# EAGLE board motor (EAGLE 4.16)
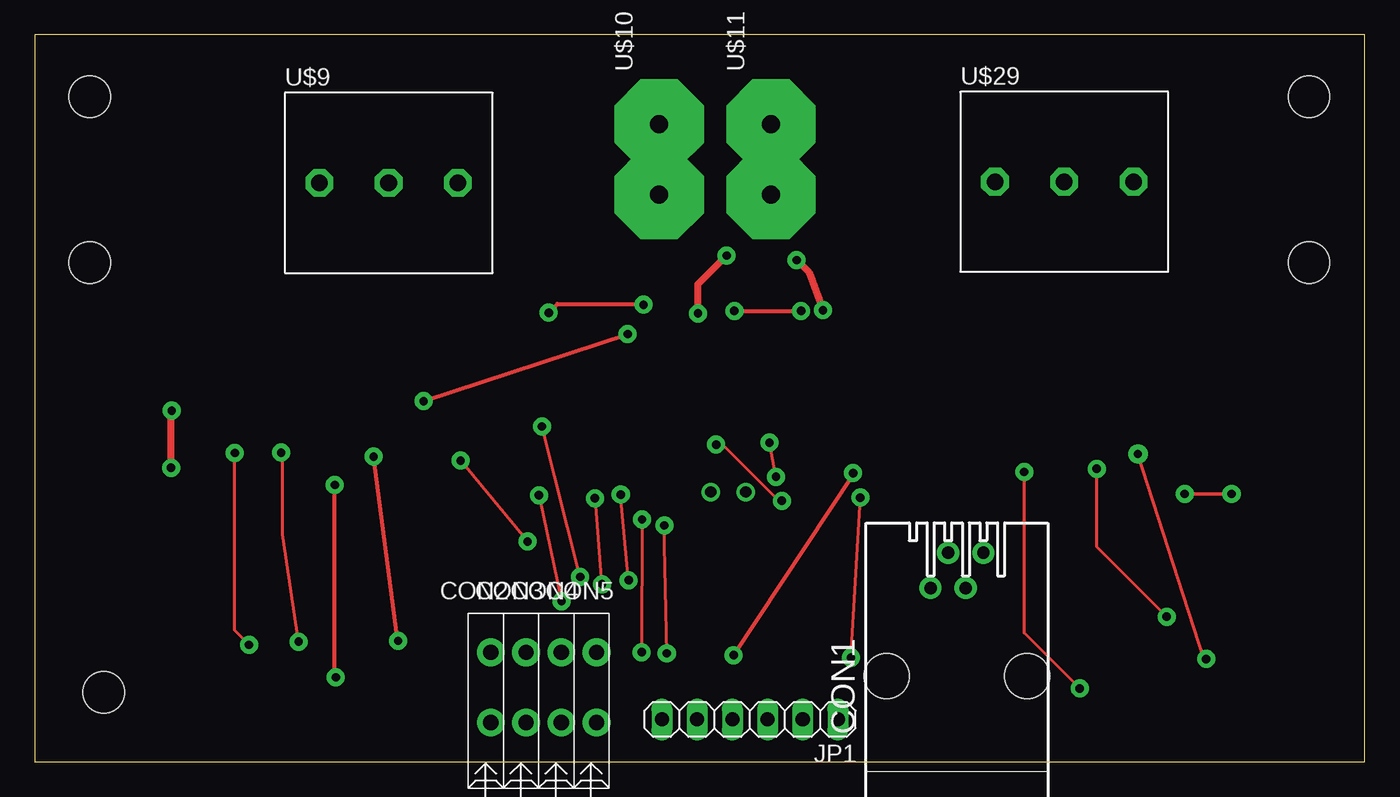
[diagram p0: board, top side]
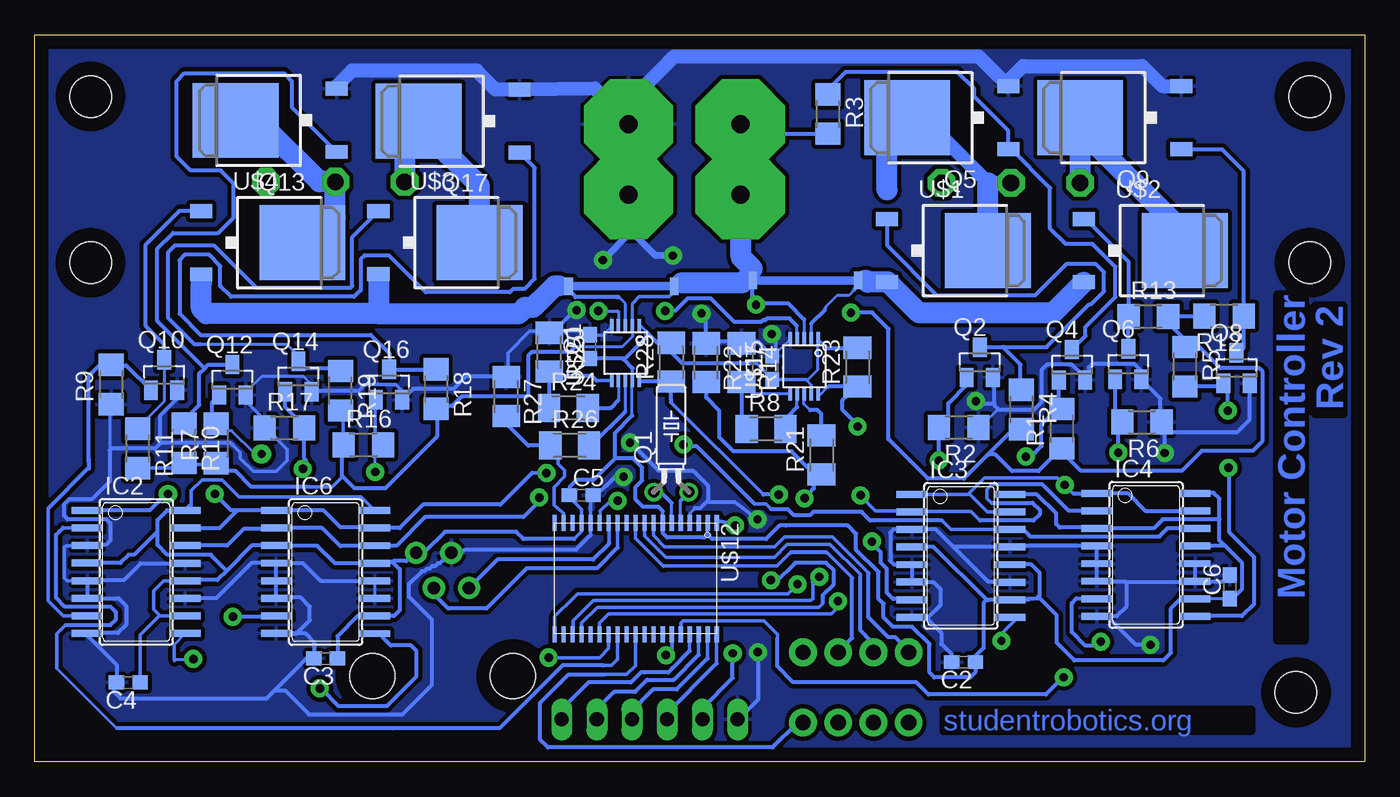
[diagram p1: board, bottom side, seen from below]

Size 96 x 52.5 mm. Coordinates in mm from the lower left corner, seen from the top.
Outline: 0,0 96,0 96,52.5 0,52.5 0,0
Copper layers (1*16): Top 0.035mm / dielectric 1.5mm / Bottom 0.035mm
Design rules "default": minimum track width 10mil, minimum drill 24mil, track to track 8mil, track to pad 8mil, pad to pad 8mil, via to via 8mil, smd to smd 8mil, copper to edge 40mil, drill to drill 8mil, minimum pad ring 10mil, minimum via ring 8mil, stop-mask expansion 4mil, vias tented up to drill 0mil, thermal gap 10mil
Holes 3 mm at 3.97,48.03 4.97,5.03 91.97,48.03 91.97,36.03 3.97,36.03

## Footprints (pad centres in the part's own frame; a part is rotated, then mirrored left to right if it is on the bottom)
C0603 = smd 1.1 x 1: 1 -0.85,0; 2 0.85,0
RJ11 = drill 0.889 pad 1.6 round: 1 1.905,7.62; 2 0.635,5.08; 3 -0.635,7.62; 4 -1.905,5.08 | hole 3.251: -5.08,-1.27; 5.08,-1.27
CAGECLAMP = drill 1.1 pad 2 round: 1 0,-0.01; 2 0,-5.08
SOP16 = smd 0.5 x 2.2: 1 -4.445,-3.55; 2 -3.185,-3.55; 3 -1.915,-3.55; 4 -0.645,-3.55; 5 0.635,-3.55; 6 1.895,-3.55; 7 3.165,-3.55; 8 4.435,-3.55; 9 4.445,3.55; 10 3.175,3.55; 11 1.905,3.55; 12 0.635,3.55; 13 -0.635,3.55; 14 -1.905,3.55; 15 -3.175,3.55; 16 -4.445,3.55
1X06 = drill 1.016 long: 1 -6.35,0; 2 -3.81,0; 3 -1.27,0; 4 1.27,0; 5 3.81,0; 6 6.35,0
TC26H = drill 0.813 round: 1 -1.27,0; 2 1.27,0
SOT23 = smd 1 x 1.4: 1 -0.95,-1.1; 2 0.95,-1.1; 3 0,1.1
TO252-3 = smd 1 x 1.6: 1 -2.16,-5.72; 3 2.4,-5.72 | smd 5.4 x 6.2: 2 0.12,1.58
R1206 = smd 1.6 x 1.803: 1 -1.422,0; 2 1.422,0
M1206 = smd 1.6 x 2: 1 -1.4,0; 2 1.4,0
HEADER_5MM_3 = drill 1.2 pad 2 octagon: 1 0,0; 2 5,0; 3 10,0
SPADE = drill 1.3 pad 6.452 octagon: P$1 -5.08,-3.175; P$2 0,-3.175
TSSOP38 = smd 1.15 x 0.3: 1 0,0; 2 0,-0.65; 3 0,-1.3; 4 0,-1.95; 5 0,-2.6; 6 0,-3.25; 7 0,-3.9; 8 0,-4.55; 9 0,-5.2; 10 0,-5.85; 11 0,-6.5; 12 0,-7.15; 13 0,-7.8; 14 0,-8.45; 15 0,-9.1; 16 0,-9.75; 17 0,-10.4; 18 0,-11.05; 19 0,-11.7; 20 8.05,-11.7; 21 8.05,-11.05; 22 8.05,-10.4; 23 8.05,-9.75; 24 8.05,-9.1; 25 8.05,-8.45; 26 8.05,-7.8; 27 8.05,-7.15; 28 8.05,-6.5; 29 8.05,-5.85; 30 8.05,-5.2; 31 8.05,-4.55; 32 8.05,-3.9; 33 8.05,-3.25; 34 8.05,-2.6; 35 8.05,-1.95; 36 8.05,-1.3; 37 8.05,-0.65; 38 8.05,0
TRACK-RESISTOR = smd 0.635 x 1.27: P$1 -3.81,0; P$2 3.81,0
UMAX = smd 0.94 x 0.254: 1 -1.358,0.193; 2 -1.358,-0.307; 3 -1.358,-0.808; 4 -1.358,-1.308; 5 -1.358,-1.808; 6 2.616,-1.808; 7 2.616,-1.308; 8 2.616,-0.808; 9 2.616,-0.307; 10 2.616,0.193

## Placement (x,y rotation side)
C1  100nf  [C0603]  55.92,29.98 90 bottom
C2  100nf  [C0603]  28.96,7.21 180 bottom
C3  100nf  [C0603]  75,7.46 180 bottom
C4  100nf  [C0603]  89.24,5.74 180 bottom
C5  100nf  [C0603]  56.56,19.25 0 bottom
C6  100nf  [C0603]  9.74,12.63 90 bottom
C7  100nf  [C0603]  42.77,28.45 90 bottom
CON1  MODULE_CON  [RJ11]  66.56,7.48 0 top
CON2  FB0  [CAGECLAMP]  32.93,2.83 180 top
CON3  FB1  [CAGECLAMP]  35.47,2.83 180 top
CON4  FB3  [CAGECLAMP]  38.01,2.83 180 top
CON5  FB2  [CAGECLAMP]  40.55,2.83 180 top
IC2  74153NS  [SOP16]  88.67,13.71 270 bottom
IC3  74153NS  [SOP16]  29.15,14.88 270 bottom
IC4  74153NS  [SOP16]  15.8,14.94 270 bottom
IC6  74153NS  [SOP16]  75,13.71 270 bottom
JP1  JTAG  [1X06]  51.62,3.06 180 top
Q1  32Khz  [TC26H]  50.05,19.48 0 bottom
Q2  2N7002  [SOT23]  27.79,28.85 0 bottom
Q4  2N7002  [SOT23]  21.13,28.67 0 bottom
Q5  FDD8882  [TO252-3]  31.45,46.38 90 bottom
Q6  2N7002  [SOT23]  17.07,28.71 0 bottom
Q8  2N7002  [SOT23]  9.27,28.43 0 bottom
Q9  FDD8882  [TO252-3]  18.97,46.38 90 bottom
Q10  2N7002  [SOT23]  86.66,27.94 0 bottom
Q12  2N7002  [SOT23]  81.73,27.59 0 bottom
Q13  FDD8882  [TO252-3]  79.92,46.19 90 bottom
Q14  2N7002  [SOT23]  76.97,27.82 0 bottom
Q16  2N7002  [SOT23]  70.42,27.24 0 bottom
Q17  FDD8882  [TO252-3]  66.73,46.13 90 bottom
R1  [R1206]  21.88,24.05 90 bottom
R2  [R1206]  29.31,24.15 180 bottom
R3  [R1206]  38.73,46.77 270 bottom
R4  [R1206]  24.79,25.44 270 bottom
R5  [R1206]  12.99,28.53 270 bottom
R6  [R1206]  16.09,24.54 180 bottom
R7  [R1206]  82.89,22.99 90 bottom
R8  [M1206]  43.21,24.04 0 bottom
R9  [R1206]  90.49,27.24 90 bottom
R10  [R1206]  85.21,23.01 270 bottom
R11  [R1206]  88.56,22.62 270 bottom
R12  [R1206]  10.16,32.2 180 bottom
R13  [R1206]  15.62,32.13 0 bottom
R14  [M1206]  44.99,28.82 270 bottom
R16  [R1206]  72.27,22.87 0 bottom
R17  [R1206]  77.97,24.1 0 bottom
R18  [R1206]  67.02,26.92 270 bottom
R19  [R1206]  73.92,26.8 270 bottom
R21  [M1206]  39.21,22.16 90 bottom
R22  [M1206]  47.54,28.82 270 bottom
R23  [M1206]  36.62,28.49 90 bottom
R24  [M1206]  57.48,25.55 0 bottom
R25  [M1206]  58.85,29.58 270 bottom
R26  [M1206]  57.38,22.84 0 bottom
R27  [M1206]  61.96,26.38 270 bottom
R28  [M1206]  50.06,28.85 90 bottom
U$1  FQD17P06  [TO252-3]  28.78,37.02 270 bottom
U$2  FQD17P06  [TO252-3]  14.56,37.02 270 bottom
U$3  FQD17P06  [TO252-3]  65.48,37.61 270 bottom
U$4  FQD17P06  [TO252-3]  78.25,37.6 270 bottom
U$9  HEADER_3_5MM  [HEADER_5MM_3]  20.55,41.8 0 top
U$10  6.3X0.8-SPADE  [SPADE]  41.9,46.05 90 top
U$11  6.3X0.8-SPADE  [SPADE]  49.96,46.04 90 top
U$12  MSP430F2234  [TSSOP38]  46.77,17.26 270 bottom
U$13  TRACKRESISTOR  [TRACK-RESISTOR]  40.37,34.76 180 bottom
U$15  MAX4069  [UMAX]  39.66,29.19 270 bottom
U$17  TRACKRESISTOR  [TRACK-RESISTOR]  53.65,34.34 0 bottom
U$20  MAX4069  [UMAX]  52.55,30.15 270 bottom
U$29  HEADER_3_5MM  [HEADER_5MM_3]  69.31,41.88 0 top

## Library data of the parts
C1-C7 R1-R7 R9-R13 R16-R19 = quantum-sensor
CON1-CON5 IC2-IC4 IC6 Q2 Q4-Q6 Q8-Q10 Q12-Q14 Q16 Q17 U$1-U$4 U$9 U$12 U$29 = ecssr
JP1 = pinhead
Q1 = crystal
R8 R14 R21-R28 = rcl
U$10 U$11 U$13 U$15 U$17 U$20 = ecssr-Pwr

## Nets
+12V: R1.1 R3.2 R4.2 R5.1 R7.1 R10.2 R11.2 R12.2 R13.2 R16.1 R18.2 R19.2 U$10.P$2 U$13.P$2 U$15.3 U$17.P$2 U$20.2
FEEDBACK_0: CON2.2 U$12.8
FEEDBACK_1: CON3.2 U$12.9
FEEDBACK_2: CON4.2 U$12.10
FEEDBACK_3: CON5.1 U$12.29
GND: C1.2 C2.2 C3.2 C4.2 C5.2 C6.2 C7.2 CON1.3 IC2.3 IC2.5 IC2.6 IC2.8 IC2.11 IC2.13 IC3.3 IC3.5 IC3.6 IC3.8 IC3.11 IC3.13 IC4.4 IC4.5 IC4.6 IC4.8 IC4.11 IC4.12 IC6.4 IC6.5 IC6.6 IC6.8 IC6.11 IC6.12 JP1.6 Q2.2 Q4.2 Q5.3 Q6.2 Q8.2 Q9.3 Q10.2 Q12.2 Q13.3 Q14.2 Q16.2 Q17.3 R2.1 R6.1 R9.1 R14.1 R17.1 R22.1 R25.1 R27.1 U$11.P$2 U$12.4 U$12.15 U$15.5 U$20.5
M0_A: IC3.14 IC4.14 U$12.14
M0_B: IC3.2 IC4.2 U$12.25
M0_COUT: R21.1 R22.2 U$12.20
M0_GSEL: R23.1 U$12.22 U$15.10
M0_PWM: IC3.1 IC3.15 IC4.1 IC4.15 U$12.34
M0_V+: U$1.3 U$2.3 U$13.P$1 U$15.2
M1_A: IC2.14 IC6.2 IC6.14 U$12.26
M1_B: IC2.2 U$12.27
M1_COUT: R26.1 R27.2 U$12.18
M1_GSEL: R28.1 U$12.23 U$20.10
M1_PWM: IC2.1 IC2.15 IC6.1 IC6.15 U$12.33
M1_V+: U$3.3 U$4.3 U$17.P$1 U$20.3
N$1: JP1.1 U$12.35
N$2: JP1.2 U$12.36
N$3: Q5.2 U$1.2 U$9.2
N$4: Q1.1 U$12.6
N$5: Q2.3 R4.1 U$1.1
N$6: Q4.3 Q5.1 R3.1
N$7: JP1.3 U$12.37
N$8: IC3.7 Q2.1 R2.2
N$9: JP1.4 U$12.38
N$10: JP1.5 U$12.1
N$11: Q17.2 U$3.2 U$29.1
N$12: Q13.2 U$4.2 U$29.2
N$13: IC3.9 Q4.1 R1.2
N$14: Q9.2 U$2.2 U$9.1
N$15: Q6.3 R13.1 U$2.1
N$16: Q8.3 Q9.1 R12.1
N$17: IC4.7 Q6.1 R6.2
N$18: IC4.9 Q8.1 R5.2
N$19: Q1.2 U$12.5
N$23: R21.2 U$15.8
N$25: R8.2 U$15.7
N$26: Q10.3 R11.1 U$4.1
N$27: Q12.3 Q13.1 R10.1
N$28: R8.1 R14.2 U$15.6
N$29: IC2.7 Q10.1 R9.2
N$30: IC2.9 Q12.1 R7.2
N$32: R24.2 U$20.7
N$33: R24.1 R25.2 U$20.6
N$34: R26.2 U$20.8
N$37: Q14.3 R19.1 U$3.1
N$38: Q16.3 Q17.1 R18.1
N$39: IC6.7 Q14.1 R17.2
N$40: IC6.9 Q16.1 R16.2
N$46: U$12.30
N.C.: U$15.4 U$20.4
SCL: CON1.4 U$12.13
SDA: CON1.2 U$12.12
VDD: C1.1 C2.1 C3.1 C4.1 C5.1 C6.1 C7.1 CON1.1 IC2.4 IC2.10 IC2.12 IC2.16 IC3.4 IC3.10 IC3.12 IC3.16 IC4.3 IC4.10 IC4.13 IC4.16 IC6.3 IC6.10 IC6.13 IC6.16 R23.2 R28.2 U$12.2 U$12.7 U$12.16 U$15.1 U$15.9 U$20.1 U$20.9

## Tracks (layer width: path | path; a pad name or v marks a point on that pad's centre or on a via)
+12V  (via drill 0.6 pad 1.3)
  Top 0.2: 43.97,33.05 43.97,33.03 v43.95,33.01
  Top 0.3: v37.09,32.43 37.72,33.05 43.97,33.05
  Bottom 0.2: U$17.P$2 49.84,33.91 49.99,33.76 50.02,33.78 | U$13.P$2 44.18,34.56 | 49.34,34.33 49.37,34.36 49.39,34.34 U$17.P$2 | 14.54,32.2 14.47,32.13 R13.2 14.2,31.8 14.25,31.76 | 44.64,46.41 44.95,46.41 45.55,45.8 45.55,45.88 45.2,46.23 45.07,46.11 U$10.P$2 | 12.99,30.5 R5.1 13.65,29.95 | 40.46,31.95 U$15.3 | 73.92,25.53 R19.2 73.75,25.2 | 67.09,25.42 67.09,25.33 | R18.2 67.09,25.42 | 67.09,25.42 67.09,25.71 | 73.75,22.17 R16.1 73.69,22.7 73.55,22.55 | 88.67,21.23 88.59,21.23 R11.2 | R10.2 85.87,21.23 | 24.79,23.8 24.79,23.82 R4.2 | 85.68,21 85.75,20.93 | R10.2 85.68,21 | R7.1 83.61,21.46 83.61,21.21 83.41,21 | 85.68,21 85.5,21.17 | R7.1 83.12,21.23 83.09,21.26 82.75,20.91 | 37.07,32.41 v37.09,32.43 v37.09,32.44 | R18.2 67,25.53 66.97,25.51 | 57.07,29.96 57.02,29.96 53.62,29.96 52.86,30.71 U$20.2 52.87,33.08 52.8,33.16 | 67.37,25.68 67.2,25.68 R18.2 | U$13.P$2 44.2,34.76 44.22,34.73 44.17,34.68 44.17,34.26 | 44.17,34.26 44.17,34.2 | U$13.P$2 44.18,35.59 44.2,35.61 | U$13.P$2 44.72,34.76 44.74,34.78 | 49.3,34.58 49.32,34.55 49.62,34.55 U$17.P$2 | 21.95,22.55 21.94,22.55 R1.1 21.93,22.62 | 44.05,33.11 v43.95,33.01 44.02,33.08 44.02,33.11 44.2,33.28 | 44.2,34.26 44.17,34.26 | 83.09,21.03 | R7.1 83.09,21.03 | 83.09,21.03 82.47,21.03 | R4.2 25.01,24.24 | R10.2 85.33,21.58 85.41,21.5 85.37,21.46 | 27.22,22.26 27.17,22.21 27.15,22.19 | R4.2 24.68,24.12 24.68,24.2 25.19,24.2
  Bottom 0.25: 73.75,22.17 73.75,25.2 | 85.87,21.23 88.59,21.23 | 83.61,21.46 85.37,21.46 | 34.39,23.3 34.37,23.32 | 73.81,22.75 R16.1 | 73.81,20.64 73.78,20.61 74.53,19.86 76.25,19.86 | 50.02,33.78 50.22,33.58 52.37,33.58 52.8,33.16
  Bottom 0.3: 14.54,32.2 R12.2 | R3.2 43.58,45.34 44.64,46.41 | 12.99,30.5 14.25,31.76 | R5.1 11.94,29.95 10.42,28.43 7.62,28.43 7.37,28.18 7.37,23.18 8.09,22.46 11.77,22.46 13.21,21.01 20.48,21.01 22.07,22.6 22.05,22.62 R1.1 | 67.2,25.68 65.87,25.68 65.18,26.37 60.51,26.37 60.38,26.5 60.38,29.32 60.13,29.57 57.37,29.57 57.02,29.92 57.02,29.96 | 40.46,31.95 41.62,33.11 44.02,33.11 | 44.2,33.28 44.2,34.26 | 66.97,25.51 66.97,23.48 70.7,19.76 72.92,19.76 73.78,20.61 | 76.25,19.86 80.36,19.86 81.51,21 83.41,21 | 25.19,24.2 27.17,22.21 28.93,20.46 31.55,20.46 34.39,23.3 | 21.93,22.62 23.56,20.99 25.47,20.99 26.67,22.19 27.15,22.19 | v37.09,32.44 35.56,32.44 34.37,31.25 34.37,23.32 | 73.81,20.64 73.81,22.75
  Bottom 1: 45.14,45.98 U$10.P$2 45.14,46.12 45.14,46.2
  Bottom 1.5: 45.02,46.1 45.02,46.16 | 45.02,46.1 U$10.P$2 | 44.2,35.61 45.02,36.43 45.02,46.1 | 44.74,34.78 44.95,34.58 49.3,34.58
FEEDBACK_0
  Bottom 0.2: 51.34,17.36 51.34,17.28 U$12.8 | 33.08,7.91 33.09,7.93 | 33.08,7.91 CON2.2 32.93,8.04 | 33.08,7.91 32.93,7.77 | 35.8,10.4 35.82,10.4
  Bottom 0.25: 51.34,17.28 51.34,16.34 50.54,15.53 43.05,15.53 | 43.05,15.53 43.01,15.53 | 35.82,13.63 35.82,13.64 38.43,16.25 41.88,16.25 42.6,15.53 43.05,15.53
  Bottom 0.3: 35.82,10.4 35.82,13.63 | 32.93,8.04 33.9,9 34.4,9 35.8,10.4
FEEDBACK_1
  Bottom 0.2: 51.97,17.33 U$12.9 | 51.95,16.41 51.97,16.41 51.97,16.32 | 35.55,7.83 CON3.2
  Bottom 0.25: 51.97,16.46 U$12.9 | 51.97,16.41 51.97,16.46 | 36.42,13.38 36.42,13.53 38.59,15.7 41.7,15.7 42.62,14.78 50.45,14.78 51.99,16.32 51.97,16.32 | 51.97,16.46 51.98,16.46 51.98,16.39
  Bottom 0.3: 36.42,13.38 36.42,9.5 35.59,8.68 35.59,7.88 35.55,7.83
FEEDBACK_2
  Bottom 0.2: 52.64,17.38 52.64,17.28 U$12.10 | 38.07,7.88 38.04,7.91 37.96,7.99 | 37.96,7.99 37.96,7.96 CON4.2 | 37.96,7.99 37.96,8.01
  Bottom 0.25: 52.64,17.28 52.64,16.14 50.83,14.32 | 50.83,14.32 50.62,14.11 50.61,14.1 | 38.84,15.11 38.83,15.11 38.82,15.12 37.01,13.31 37.01,13.28 | 41.44,15.11 42.41,14.14 50.65,14.14 50.83,14.32
  Bottom 0.3: 38.04,7.91 37.01,8.94 37.01,13.28 | 38.84,15.11 41.44,15.11
FEEDBACK_3
  Bottom 0.2: 40.55,2.55 CON5.1 40.59,2.84 | 40.59,2.84 40.72,2.7 | 40.59,2.84 40.55,2.88
  Bottom 0.25: U$12.29 52.62,6.95 53.27,6.31 54.89,6.31
  Bottom 0.3: 58.07,5.7 59.52,4.25 59.52,1.6 58.96,1.04 42.74,1.04 41,2.78 40.61,2.78 CON5.1 | 58.07,5.7 58.02,5.75 | 58.07,5.7 57.46,6.31 54.89,6.31
GND  (via drill 0.6 pad 1.3)
  Top 0.2: v56.89,32.61 56.82,32.45 | v43.84,17.51 v43.8,7.92 | v14.45,22.3 14.45,9.48 v15.47,8.46 | v53.49,20.58 v53.03,23.05 | 42.83,30.87 v42.8,30.88
  Top 0.3: v28.07,26.05 42.83,30.87
  Top 0.5: v54.99,36.23 55.87,35.36 v56.89,32.61 | v47.87,32.38 47.87,34.48 v49.95,36.55
  Bottom 0.2: 16.12,28.21 Q6.2 16.17,27.66 | 20.18,27.52 20.34,27.36 | 20.18,27.52 Q4.2 20.18,27.72 | 19.92,27.78 20.18,27.52 | U$15.5 41.46,30.54 42.7,29.3 C7.2 42.64,29.43 42.55,29.43 | U$20.5 54.36,31.41 54.95,30.83 C1.2 55.79,30.83 | 55.79,30.83 55.77,30.8 | 56.12,31.16 55.79,30.83 | 61.96,27.7 61.92,27.66 | R27.1 61.96,27.7 | 61.99,28.33 61.99,27.73 61.96,27.7 | 47.49,30.88 47.55,30.93 | 47.49,30.88 R22.1 47.54,30.25 47.62,30.33 | 47.49,30.88 46.83,30.21 47.1,30.21 47.64,30.76 47.64,30.93 47.59,30.98 | 45.1,30.33 R14.1 | 26.83,27.92 26.84,27.93 | 26.83,27.92 Q2.2 | 26.72,27.8 26.83,27.92 | IC3.13 25.49,15.6 25.48,15.59 | IC3.11 25.73,12.97 25.79,13.03 25.89,12.93 | IC3.3 31,16.79 | IC3.5 32.61,14.24 32.59,14.23 32.47,14.35 | IC3.5 32.7,14.26 32.72,14.28 | IC3.6 32.55,12.98 32.52,12.96 32.49,12.98 32.45,13.03 | IC4.6 19.35,12.98 19.34,12.98 | IC4.4 19.35,15.66 19.42,15.73 | 19.25,10.51 19.22,10.48 | 19.25,10.51 IC4.8 | 19.25,10.51 19.27,10.53 18.5,10.53 18.5,10.43 | 12.49,12.98 12.43,13.04 IC4.11 12.2,13.1 12.25,13.16 | 9.74,13.5 9.67,13.58 | 9.74,13.5 C6.2 | 10.21,13.04 9.74,13.5 | IC6.5 78.55,13.02 78.57,13 | 78.61,11.81 78.64,11.78 | 78.61,11.81 IC6.6 78.55,11.89 78.57,11.9 | 78.57,11.9 78.57,11.85 78.61,11.81 | 78.17,9.15 78.27,9.25 78.28,9.27 IC6.8 78.69,9.27 78.72,9.3 | 78.55,14.41 78.59,14.46 | IC6.4 78.55,14.41 | 78.55,14.41 78.5,14.35 | IC2.11 85.32,11.8 | 92.27,9.21 92.22,9.25 IC2.8 92.53,9.27 | IC6.12 71.45,13.09 | 71.45,13.09 IC6.11 | 71.45,13.09 71.5,13.13 | 92.3,15.63 92.37,15.71 | 92.22,11.98 92.32,11.88 92.25,11.81 IC2.6 91.44,11.81 | 91.44,11.81 91,11.81 | 92.53,9.27 92.55,9.25 | 92.5,9.3 92.53,9.27 | 90.37,5.58 90.21,5.74 C4.2 90.3,5.53
  Bottom 0.2: Q12.2 80.83,26.43 | Q16.2 69.52,26.19 69.52,26.61 | R27.1 62.1,27.63 | 90.59,22.51 90.55,22.51 90.55,25.76 R9.1 | 85.7,26.57 Q10.2 85.7,26.72 85.75,26.68 | 75.8,7.75 76.07,7.48 76.05,7.46 C3.2 76,7.46 76.19,7.66 | 80.84,26.13 80.78,26.2 Q12.2 | 56.74,32.61 v56.89,32.61 56.99,32.61 | 53.02,46.16 53.02,46.36 | 53.02,46.16 U$11.P$2 | 53.02,46.16 53.02,38.38 53.02,38.2 | IC3.3 | 29.67,15.51 29.72,15.55 | R27.1 62,27.73 | 79.87,23.61 79.87,23.68 79.55,24.01 79.55,24.05 79.43,24.05 R17.1 | R17.1 79.39,24.08 R17.1 | v47.87,32.38 47.55,32.38 | 14.75,24.61 R6.1 14.64,24.53 14.64,24.26 14.37,23.98 14.37,23.86 14.42,23.8 | 17.25,12.98 17.25,12.93 17.2,12.88 | C5.2 55.49,19.25 55.47,19.23 55.88,18.83 | 55.87,17.28 U$12.15 | 68.05,13.75 67.89,13.75 | 66.89,14.33 66.77,14.33 | 66.06,15.09 CON1.3 | 66.52,14.58 66.52,14.63 | 59.22,31.11 59.17,31.16 R25.1 58.64,31.16 58.55,31.05 | 61.84,27.83 61.91,27.83 R27.1 | v14.45,22.3 14.42,22.33 | v42.8,30.88 42.55,30.86 | v47.87,32.38 47.92,32.55 | 47.55,32.18 v47.87,32.38 | 76.19,26.71 Q14.2 76.36,26.71 76.05,27.02 76.05,27.28 76.57,27.8 79.62,27.8 80.87,26.55 80.87,26.48 Q12.2 | 79.37,24.07 79.37,23.93 | 79.37,24.07 R17.1 | 79.37,24.66 79.37,24.07 | 79.51,23.98 79.64,23.98 | R17.1 79.51,23.98 | 79.51,23.98 79.19,23.98 | 78.55,11.88 78.57,11.9 | IC2.5 92.3,13 | IC2.5 | IC2.5 92.14,13.15 | 78.62,5.23 78.55,5.16 | 91.5,15.68 91.59,15.58 92.42,15.58 92.44,15.6 92.42,15.62 IC2.3 92.29,15.62 92.3,15.63 | 91.44,11.81 91.44,11.85 91.39,11.8 | 92.3,15.63 92.32,15.6 | 48.34,18.3 48.72,17.93 48.72,17.29 48.73,17.29 48.72,17.28 U$12.4 | 47.42,18.88 47.39,18.86 47.4,18.85 47.31,18.76 | U$12.4 48.72,17.23
  Bottom 0.2: U$12.4 | 32.65,10.4 32.67,10.4 IC3.8 | 32.72,10.46 32.74,10.46 | IC3.8 32.72,10.46 | 32.72,10.46 32.56,10.46 | IC3.3 32.72,16.78 | 32.67,14.21 32.4,14.21 | 32.67,14.21 IC3.5 | 33.62,14.25 33.57,14.21 32.67,14.21 | 29.81,7.75 C2.2 | 31.59,10.35 31.7,10.46 | IC3.8 32.78,10.44 32.8,10.46 32.9,10.55 | R2.1 27.83,24.15 27.81,24.13 26.54,25.41 26.42,25.41 | v53.03,23.05 52.99,23.05 | 72.17,27.26 72.16,27.25 72.16,27.24 72.17,27.23
  Bottom 0.25: U$12.15 55.88,18.83 | 55.87,16.38 U$12.15 | 59.22,31.11 60.27,31.11 61.84,29.53 61.84,27.83 | 79.19,23.98 77.77,22.55 77.77,21.76 78.57,20.96 80.2,20.96 81.16,21.91 81.16,22.32 81.7,22.87 | 54.12,20.58 v53.49,20.58 | IC2.5 93.66,13.07 93.87,13.28 93.87,15.5 93.77,15.6 92.32,15.6 | Q12.2 80.74,26.48 80.74,26.03 79.37,24.66 | 75.94,26.79 Q14.2 | 72.17,27.26 69.95,27.26 69.4,26.71 69.4,26.34 69.49,26.25 69.47,26.23 Q16.2 | 61.7,27.81 61.92,27.81 R27.1 | v43.84,17.51 43.82,17.52 43.88,17.71 43.8,17.51
  Bottom 0.3: 16.12,28.21 16.64,28.73 19.67,28.73 19.92,28.48 19.92,27.78 | 20.18,27.72 21.14,28.68 22.95,28.68 23.34,28.28 23.34,25.96 23.89,25.41 26.41,25.41 | C7.2 43.8,30.33 45.1,30.33 47.62,30.33 | 26.41,25.41 26.42,25.41 | 26.72,25.83 26.72,27.8 | IC4.4 25.48,15.59 | IC3.5 IC3.6 | IC4.6 IC4.5 19.35,15.66 | 12.49,12.98 17.25,12.98 19.35,12.98 | 12.25,13.16 IC4.12 | IC4.11 10.21,13.04 | 78.55,13.02 IC6.4 | 78.57,11.9 78.57,13 | C4.2 90.09,7.03 92.27,9.21 | IC2.5 92.22,11.98 | IC2.11 82.89,11.8 80.35,14.35 IC6.4 | 78.69,9.27 76.46,9.27 75.8,8.6 75.8,7.75 | 25.79,13.03 27.2,13.03 29.72,15.55 30.95,16.78 IC3.3 | 90.59,22.51 90.59,20.26 91.89,18.96 93.52,18.96 93.89,18.58 93.89,17.78 93.64,17.53 90.84,17.53 90.55,17.23 90.55,15.98 90.84,15.68 91.5,15.68 | IC3.13 29.67,15.51 | Q8.2 8.31,24.71 9.22,23.8 14.42,23.8 14.42,22.33 | Q6.2 14.75,26.23 14.75,24.61 | 18.5,10.53 17.89,10.53 17.2,11.23 17.2,12.88 | 67.89,13.75 67.7,13.96 67.5,13.96 67.3,14.15 67.07,14.15 66.89,14.33 | 66.77,14.33 66.52,14.58 | 66.52,14.63 66.06,15.09 | v15.47,8.46 16.52,8.46 18.5,10.43 | 42.55,30.86 42.55,29.43 | 47.55,30.93 47.55,32.18 | 90.3,5.53 90.3,5.08 89.8,4.58 79.27,4.58 78.62,5.23 76.19,7.66 | 78.27,9.25 77.12,9.25 76.14,10.23 76.14,11.21 76.82,11.88 78.55,11.88 | 56.99,32.61 58.55,31.05 | 55.47,19.23 54.12,20.58 | 78.5,14.35 76.64,14.35 75.36,13.07 IC6.12 | IC2.13 88.36,14.34 89.55,13.15 92.14,13.15 | 68.05,13.75 69,12.8 68.98,12.79 68.98,11.91 67.32,10.25 67.32,5.57 69.46,3.43 76.19,3.43 77.92,5.16 78.55,5.16 | 92.5,9.3 90,9.3 89.39,9.9 89.39,11.25 89.94,11.8 91.39,11.8 | 48.34,18.3 47.99,18.3 47.42,18.88 47.42,19.96 48.49,21.03 50.98,21.03 52.99,23.05
  Bottom 0.3: 29.81,7.75 30.57,8.5 30.57,9.33 31.59,10.35 | 31.7,10.46 32.8,10.46 | 32.49,12.98 31.12,12.98 30.64,12.5 30.64,11.3 31.59,10.35 | 31.59,10.35 31.62,10.33 | 47.31,18.76 45.47,18.76 43.8,17.51 | 75.94,26.79 72.61,26.79 72.17,27.23 | Q16.2 68.69,26.92 65.78,26.92 64.89,27.81 61.92,27.81 | v28.07,26.05 27.85,25.83 26.72,25.83 | 26.41,25.41 26.41,25.43 26.72,25.74 26.72,25.83 | JP1.6 45.2,3.06 43.8,4.46 v43.8,7.92 | 55.87,16.38 56.92,15.33 64.96,15.33 65.32,14.97 66.05,14.97 | 66.05,14.97 66.12,14.97 | CON1.3 66.05,14.97 | IC6.4 78.46,14.35 | 81.7,22.87 81.85,23.01 86.93,23.01 | 90.55,22.51 90.43,22.62 87.3,22.62 86.93,22.99 86.93,23.01 | 86.93,23.01 86.93,25.02 85.82,26.13 85.82,26.44 85.7,26.55 Q10.2 | 33.62,14.25 33.98,14.25 34.25,14.52 34.25,16.54 34.01,16.78 32.75,16.78 32.73,16.76 IC3.3 | R25.1 58.66,30.98 58.48,31.16 56.12,31.16
  Bottom 0.5: 53.02,38.2 v54.99,36.23 | v49.95,36.55 51.2,36.55 53.02,38.38
  Bottom 1: Q9.3 14.62,48.79 16.07,50.23 24.67,50.23 25.77,49.13 25.73,49.09 Q5.3 | 74.27,48.73 74.2,48.66 Q13.3 74.2,48.71 74.25,48.76 73.09,49.91 64.09,49.91 62.72,48.53 Q17.3 55.57,48.61 53.02,46.05 53.03,46.04 U$11.P$2 | U$11.P$2 54.28,47.18 | 53.09,45.95 53.14,46 U$11.P$2 | Q5.3 27.45,50.51 | 53.2,46.01 53.82,46.01 53.8,46.03 U$11.P$2 | U$11.P$2 53.02,46.03 | U$11.P$2 | U$11.P$2 53.2,45.98 53.24,45.98 53.24,47.53 50.22,50.55 | 50.22,50.55 50.17,50.61 | Q5.3 27.88,50.93 49.84,50.93 50.22,50.55
  pour Bottom (isolate 0.3): -9.64,55.49 -9.64,-0.93 98.21,-1.93 98.21,54.49
M0_A  (via drill 0.6 pad 1.3)
  Top 0.2: v53.92,18.86 53.88,18.86 53.79,18.76 49.65,22.9 v49.18,22.9
  Bottom 0.2: IC4.14 12.34,16.85 12.39,16.91 12.45,16.86 | v53.92,18.86 54.45,18.86 | U$12.14 55.23,17.23 55.2,17.21 55.2,18.11 | 25.71,16.78 25.76,16.73 | 25.71,16.78 IC3.14 | 24.72,16.84 25.65,16.84 25.71,16.78
  Bottom 0.25: IC3.14 29.87,16.78 30.51,17.42 | 54.45,18.86 55.2,18.11 | 42.83,18.24 43.22,18.63 44.06,18.63 | 49.2,22.78 49.2,22.88
  Bottom 0.3: 12.45,16.86 14.25,16.86 14.82,16.28 14.82,16.26 24.12,16.26 24.26,16.39 24.27,16.39 | 24.27,16.39 24.72,16.84 | 24.27,16.39 24.16,16.28 | 30.51,17.42 35.7,17.42 36.33,18.05 39.81,18.05 40.06,17.8 41.2,17.8 41.64,18.24 42.83,18.24 | 49.22,22.88 49.2,22.88 v49.18,22.9 | 44.06,18.63 48.21,22.78 49.2,22.78
M0_B  (via drill 0.6 pad 1.3)
  Top 0.2: v36.39,19.25 v38.02,11.6
  Bottom 0.2: IC3.2 32.81,18.06 32.84,18.03 32.82,18.01 | IC3.2 33.12,18.06 33.15,18.08 32.67,18.08 32.69,18.08 IC3.2 | 30.87,18.08 30.74,18.08 | IC3.2 32.76,18.11 | 23.48,20.05 23.49,20.04 23.65,20.04 | 38.06,11.56 v38.02,11.6 38.02,11.25 | 27,19.93 27.02,19.93
  Bottom 0.25: 26.95,18.71 27.27,19.03 27.27,19.68 27.02,19.93 | 32.67,18.08 30.87,18.08 28.42,18.08 27.77,17.43 | v36.39,19.25 35.33,18.11 32.76,18.11 | 26.89,20.04 27,19.93 | U$12.25 55.23,10.04 54.59,10.68 38.51,10.68 38,11.19 38.02,11.21 v38.02,11.6
  Bottom 0.3: 27.77,17.43 23.92,17.43 23.47,17.88 23.47,18.19 23.99,18.71 26.95,18.71 | 26.89,20.04 23.65,20.04 23.28,20.04 21.37,18.13 IC4.2
M0_COUT  (via drill 0.6 pad 1.3)
  Top 0.2: v40.43,19.03 40.39,19.1 40.57,19.04 40.46,19.42 v40.95,12.83
  Bottom 0.2: v40.43,19.03 40.37,19.04 | 57.08,11.89 57.07,11.9 | 39.18,20.79 39.07,20.79 | 39.18,20.79 R21.1 | 39.74,20.79 39.18,20.79 | 47.54,27.59 47.6,27.65 | 47.54,27.59 R22.2 | 47.53,27.58 47.54,27.59
  Bottom 0.25: U$12.20 58.48,10.49 57.08,11.89 56.9,12.07 56.83,12.14 41.64,12.14 v40.95,12.83
  Bottom 0.3: v40.43,19.03 39.74,19.76 39.74,20.79 41.37,22.42 45.57,22.42 46.58,23.43 46.58,25.34 47.53,26.29 47.53,27.58 | v40.95,12.83 40.95,12.88
M0_GSEL  (via drill 0.6 pad 1.3)
  Top 0.2: v39.37,13.36 v36.61,24.21
  Bottom 0.2: 38.73,27.09 39.39,26.43 39.46,26.5 U$15.10 39.44,26.55 | 57.16,9.22 U$12.22 | 39.59,13.21 39.52,13.21 v39.37,13.36
  Bottom 0.25: 57.16,9.22 57.16,10.18 55.68,11.66 39.97,11.66 39.87,11.76 39.84,11.76 39.84,12.96 | 36.59,24.29 36.61,24.27 v36.61,24.21 | 36.62,27.14 36.6,27.16 | 36.62,27.14 R23.1 | 37.31,26.5 37.26,26.5 36.62,27.14
  Bottom 0.3: R23.1 38.73,27.09 | 36.59,24.29 37.69,25.39 37.69,26.12 37.31,26.5 | 39.84,12.96 39.59,13.21
M0_PWM  (via drill 0.6 pad 1.3)
  Top 0.2: v21.73,6.1 21.66,6.17
  Top 0.3: 21.66,6.17 v21.66,19.99
  Bottom 0.2: IC4.1 19.21,19.39 19.17,19.43 19.14,19.41 | 29.5,19.32 28.51,19.32 | 32.72,19.3 IC3.1 32.7,19.37 | 32.7,19.37 32.7,19.38 | 32.7,19.37 32.77,19.3 | U$12.34 49.4,9.24 | v21.73,6.1 22.24,6.1 | 28.57,19.38 28.63,19.32
  Bottom 0.25: IC3.1 29.5,19.32 28.63,19.32 | 21.06,19.39 v21.66,19.99 22.18,20.51 27.44,20.51 28.57,19.38 27.24,18.05 IC3.15 | U$12.34 49.37,10.02 49.21,10.18 43.38,10.18 42.4,9.2 42.4,8.91
  Bottom 0.3: IC4.15 15.84,18.12 17.12,19.41 19.14,19.41 | 42.4,8.91 42.4,6.9 41.26,5.76 32.37,5.76 31.48,4.87 23.02,4.87 21.79,6.1 v21.73,6.1 | 21.06,19.39 IC4.1
M0_V+
  Bottom 0.2: 36.45,34.51 36.56,34.62 U$13.P$1 | 36.47,34.73 36.45,34.76 36.05,34.76 | U$15.2 39.97,31.63 | 39,32.59 38.97,32.63 38.95,32.66 38.95,32.83 38.09,33.68 37.24,33.68 36.84,34.08 36.87,34.08
  Bottom 0.3: 36.45,34.51 36.87,34.08 | 38.97,32.63 39.97,31.63
  Bottom 0.4: 36.47,34.73 36.49,34.76 U$13.P$1
  Bottom 1.5: U$2.3 22.5,32.41 32.17,32.41 34.42,34.66 34.45,34.62 U$1.3 | U$1.3 | 36.05,34.76 35.99,34.76 35.87,34.62 U$1.3
M1_A  (via drill 0.6 pad 1.3)
  Top 0.2: v58.91,7.53 v59.58,19.08
  Bottom 0.2: IC6.2 78.68,16.89 78.75,16.96 78.89,16.8 | IC6.14 71.72,15.61 71.75,15.58 | 54.57,9.3 U$12.26 54.57,9.3 | 54.57,9.3 54.59,9.28 | 59.46,18.94 59.58,19.06 v59.58,19.08
  Bottom 0.25: v58.91,7.53 55.24,7.53 54.59,8.18 54.59,9.28
  Bottom 0.3: IC2.14 82.11,15.62 80.92,16.8 78.89,16.8 | IC6.2 75.25,16.89 73.94,15.58 71.75,15.58 | IC6.14 69.88,15.61 67.81,17.68 60.72,17.68 59.46,18.94
M1_B
  Bottom 0.2: 90.07,2.43 94.39,6.75 | 53.92,9.33 53.92,9.25 U$12.27
  Bottom 0.25: 93.95,16.89 IC2.2 | 93.77,9.88 94.39,9.25 94.39,6.75 | 54.95,6.96 54.37,6.96 53.92,7.41 53.92,9.25 | 94.3,16.55 94.26,16.59 94.46,16.39
  Bottom 0.3: 70.18,2.43 70.14,2.43 | 70.18,2.43 90.07,2.43 | 93.77,9.88 90.55,9.88 90.12,10.3 90.12,10.8 90.52,11.21 93.82,11.21 94.46,11.84 94.46,16.39 | 94.26,16.59 93.95,16.89 | 54.95,6.96 57.91,6.96 62.44,2.43 70.18,2.43
M1_COUT
  Bottom 0.2: 62.12,24.58 61.96,24.74 R27.2 | 57.8,17.29 U$12.18 57.84,17.28 | 59.05,22.58 59.03,22.58 R26.1 | 58.36,22.56 58.5,22.56 R26.1 | 59.07,22.99 58.91,22.84 R26.1
  Bottom 0.25: 57.84,17.28 57.84,17.94 58.25,18.35 58.31,18.35 58.52,18.56 58.52,19.82 57.75,20.59 57.75,21.04 58.22,21.51 58.22,22.43 58.23,22.43 58.36,22.56
  Bottom 0.3: R26.1 60.38,22.84 62.12,24.58
M1_GSEL  (via drill 0.6 pad 1.3)
  Top 0.2: v42.87,13.11 v42.3,19.3
  Bottom 0.2: 52.29,27.53 U$20.10 52.36,27.47 52.34,27.45 | 50.09,27.42 R28.1 | v42.3,19.3 42.11,19.3
  Bottom 0.25: 39.11,11.46 39.4,11.17 55.39,11.17 56.52,10.04 U$12.23 | 50.09,26.19 50.07,26.19 50.07,25.96 43.41,19.3
  Bottom 0.3: R28.1 52.34,27.45 | 50.09,27.42 50.09,26.19 50.09,25.98 | v42.3,19.3 43.41,19.3 | 39.11,11.46 39.11,12.05 38.33,12.83 38.33,13.83 38.88,14.38 41.1,14.38 42.56,12.92 v42.87,13.11
M1_PWM  (via drill 0.6 pad 1.3)
  Top 0.25: v83,19.34 v86.38,19.34
  Top 0.3: v59.07,20.85 59.14,20.84 v50.45,7.71
  Bottom 0.2: 85.22,16.89 85.25,16.91 | 85.22,16.89 IC2.15 | 85.19,16.86 85.22,16.89 | IC6.15 71.84,16.88 71.89,16.93 | 49.99,9.3 49.99,9.24 U$12.33 | v86.38,19.34 86.51,19.34 | 81.37,18.16 81.38,18.15 | 59.17,20.86 59.16,20.85 v59.07,20.85
  Bottom 0.25: v50.45,7.71 49.99,8.15 49.99,9.24 | 59.17,20.86 60.1,20.86
  Bottom 0.3: 85.19,16.86 82.67,16.86 81.38,18.15 IC6.1 75.14,18.15 73.92,16.93 71.89,16.93 | IC2.1 87.69,18.16 86.51,19.34 | v83,19.34 81.82,18.16 81.37,18.16 | IC6.15 69.65,16.88 67.96,18.57 62.39,18.57 60.1,20.86
M1_V+
  Bottom 0.2: U$20.3 53.36,33.07 53.87,33.58 53.97,33.58 53.97,33.55 | 57.46,34.09 U$17.P$1
  Bottom 0.3: 71.16,35.2 71.16,35.21 | 71.16,35.2 U$3.3 | 71.14,34.62 71.16,34.62 71.16,35.2 | 83.93,35.25 | 83.93,35.25 U$4.3 | 83.98,34.53 83.93,34.58 83.93,35.25 | U$17.P$1 57.48,34.32 58.26,34.32 58.18,34.36 | 57.46,34.09 56.97,33.61 56.97,33.55 53.97,33.55 53.84,33.55
  Bottom 1.5: 71.1,32.33 71.14,32.33 | 59.5,33.32 59.62,33.2 | 71.1,32.36 83.59,32.36 83.98,32.74 83.98,34.53 | 71.1,32.33 71.1,32.36 | 71.1,32.36 71.14,32.36 71.14,34.62 | 71.1,32.33 61.09,32.33 60.61,32.81 60.03,32.81 59.51,33.33 59.5,33.32 | 59.5,33.32 58.46,34.36 58.18,34.36
N$1
  Bottom 0.2: 49.97,6.75 50.02,6.71 | 58.14,3.1 58.1,3.06 JP1.1
  Bottom 0.25: 48.73,8 U$12.35 | 57.84,3.93 57.84,3.4 58.14,3.1
  Bottom 0.3: 48.73,8 49.97,6.75 50.27,6.46 52.02,6.46 52.24,6.46 52.96,5.74 56.03,5.74 56.62,5.16 57.84,3.93
N$2
  Bottom 0.2: 55.55,3.5 55.43,3.39 JP1.2 55.52,3.15 55.55,3.15 55.55,3.68
  Bottom 0.25: 48.07,7.73 U$12.36
  Bottom 0.3: 48.07,7.73 49.87,5.93 51.8,5.93 52.67,5.06 54.17,5.06 55.55,3.68
N$3
  Bottom 1: Q5.2 33.03,45.95 33.07,45.91 | 33.07,45.91 34.52,44.45 | U$9.2 27.2,41.8 30.7,45.3 32.47,45.3 33.07,45.91 | 33.07,45.91 33.12,45.95
  Bottom 1.5: 34.52,44.45 34.52,41.36 34.47,41.3 | U$1.2 27.17,36.91 26.99,37.08 27.2,37.28 27.2,41.8
N$4
  Bottom 0.2: 50.84,19.51 51.02,19.33 | U$12.6 50.02,18.69
  Bottom 0.3: 50.02,18.69 50.84,19.51 | 51.35,19.46 51.37,19.46 | 51.35,19.46 Q1.1 | 51.02,19.33 51.14,19.46 51.35,19.46
N$5
  Bottom 0.2: U$1.1 34.45,39.23 34.32,39.36 | R4.1 24.84,26.86 25.29,26.41 | Q2.3 27.92,29.96 | Q2.3 | 26.12,29.96 Q2.3
  Bottom 0.3: 34.45,39.23 34.45,37.26 30.87,33.68 23.8,33.68 23.65,33.83 23.64,33.83 21.54,35.93 19.4,35.93 18.82,35.35 18.82,33.96 19.74,33.04 19.88,33.04 22.97,29.95 Q2.3 | 24.84,26.86 24.84,28.68 26.12,29.96
N$6
  Bottom 0.2: 25.54,44.26 25.57,44.23 Q5.1 | 38.87,48.41 38.73,48.27 R3.1
  Bottom 0.3: 25.54,44.26 22.72,41.43 22.72,38.51 21.59,37.38 19.66,37.38 18,35.72 18,33.56 20.16,31.4 20.16,30.76 21.15,29.77 | Q5.1 25.73,45.56 28.2,48.03 28.2,48.58 29.4,49.79 37.48,49.79 38.87,48.41 | 21.15,29.77 21.24,29.68 | Q4.3 21.15,29.77
N$7
  Bottom 0.2: 52.77,3.13 52.84,3.06 JP1.3 | 53.05,3.55 53.05,3.4
  Bottom 0.25: 47.42,7.48 U$12.37 | 53.05,3.4 52.77,3.13
  Bottom 0.3: 47.42,7.48 49.67,5.23 51.37,5.23 53.05,3.55
N$8  (via drill 0.6 pad 1.3)
  Top 0.2: v35.57,15.9 v30.74,21.75
  Bottom 0.2: 32.89,11.71 32.99,11.6 | IC3.7 32.89,11.71 | 32.89,11.71 32.84,11.75 | 28.67,27.27 28.73,27.34 Q2.1 | 30.06,24.91 30.75,24.22 30.74,24.21 R2.2 30.74,24.27 | 30.74,24.27 30.73,24.28 | 30.74,24.27
  Bottom 0.3: 32.84,11.75 34.05,11.75 34.49,12.21 34.49,13.93 34.93,14.37 34.93,15.13 35.57,15.77 v35.57,15.9 | 28.67,27.27 30.06,25.88 30.06,24.91 | v30.74,21.75 30.74,24.27
N$9
  Bottom 0.2: 50.55,3.33 50.35,3.13 JP1.4
  Bottom 0.25: 46.77,7.1 U$12.38
  Bottom 0.3: 46.77,7.1 50.55,3.33
N$10  (via drill 0.6 pad 1.3)
  Top 0.2: v45.45,17.08 45.43,17.19 45.65,7.81
  Top 0.3: v45.62,7.83 45.57,7.85 45.62,7.85 45.65,7.81
  Bottom 0.2: U$12.1 46.73,17.26 | v45.45,17.08 45.6,16.8
  Bottom 0.3: U$12.1 46.77,17.33 46.71,17.39 45.44,17.1 45.6,16.8 | JP1.5 47.81,3.87 45.62,6.06 45.62,7.86 45.59,7.86 v45.62,7.83
N$11
  Bottom 1: U$29.1 69.25,41.88 69.31,41.94 | 69.31,45.32 68.38,46.25 Q17.2 68.31,46.32 | 68.31,46.32 68.25,46.38 | 68.84,46.28 68.34,46.28 68.31,46.32
  Bottom 1.5: 69.31,45.32 69.31,41.94 | 68.34,46.28 67.64,46.28 67.64,45.33 63.9,41.59 U$3.2
N$12
  Bottom 1.5: U$4.2 76.59,37.48 76.69,37.38 76.69,36.91 74.3,39.3 U$29.2 75.44,41.88 79.64,46.08 80.64,46.08 80.89,46.33 81.42,46.33 81.5,46.25 | 81.5,46.25 81.59,46.16 | 81.5,46.25 Q13.2
N$13  (via drill 0.6 pad 1.3)
  Top 0.2: v26.23,8.74 26.14,9.08
  Top 0.3: 26.14,9.08 v24.46,22.04
  Bottom 0.2: R1.2 21.77,25.36 | R1.2 21.88,25.35 | R1.2 22.09,25.67 | 24.7,10.43 25.04,10.43 IC3.9 | 21.88,25.35 21.95,25.28 | 21.88,25.35 21.54,25.68 | 24.5,22.1 24.5,22.08 v24.46,22.04
  Bottom 0.25: 26.23,9.24 25.04,10.44
  Bottom 0.3: 22.09,25.67 Q4.1 | 24.5,22.1 24.03,22.1 23.33,22.8 23.33,24.36 22.22,25.47 R1.2 | 25.04,10.44 25.04,10.43 | v26.23,8.74 26.23,9.24
N$14
  Bottom 1: U$9.1 20.55,41.9
  Bottom 1.5: Q9.2 20.57,46.51 20.62,46.55 | U$9.1 | Q9.2 U$9.1 | U$9.1 20.67,41.68 | Q9.2 20.55,45.71 13.14,38.3 13.14,37.98 14.09,37.03 14.25,37.03 14.32,37.11 13.12,37.11 12.98,36.97 U$2.2
N$15
  Bottom 0.2: 20.17,39.2 20.19,39.19 U$2.1 | R13.1 17.02,32.13 17,32.11 17.07,32.03
  Bottom 0.3: R13.1 17.05,36.08 20.17,39.2 | Q6.3 17.07,32.03
N$16
  Bottom 0.2: Q9.1 13.32,44.23 13.34,44.2 13.47,44.08 | 9.39,29.23 9.27,29.36 Q8.3
  Bottom 0.3: 13.34,44.2 10.29,44.2 8.74,42.65 R12.1 8.74,29.88 9.27,29.36
N$17  (via drill 0.6 pad 1.3)
  Top 0.2: v17.79,22.33 17.89,22.43 17.89,16.43 v19.05,8.67
  Bottom 0.2: 18.02,24.83 17.81,24.83 17.68,24.71 R6.2 | 19.38,11.8 IC4.7 | 19.05,8.7 19.03,8.72 | v19.05,8.67 19.05,8.7 | 19.05,8.7 19.37,8.38
  Bottom 0.3: 18.02,24.83 Q6.1 | 19.38,11.8 20.82,11.8 21.16,11.46 21.16,9.38 20.16,8.38 19.37,8.38 | v17.79,22.33 v17.79,22.32 | v17.79,22.33 | 17.68,24.71 17.79,24.6 v17.79,22.33
N$18  (via drill 0.6 pad 1.3)
  Top 0.2: 9.84,25.3 v9.89,25.36
  Top 0.5: v9.84,21.23 9.84,25.3
  Bottom 0.2: 9.99,27.33 9.97,27.36 | 9.99,27.33 Q8.1 10.27,27.28 9.89,26.91 | 9.99,27.33 10.22,27.1 | 12.47,10.53 12.44,10.5 IC4.9 | 9.82,21.21 v9.84,21.23 9.84,21.28 9.79,21.33
  Bottom 0.3: 10.22,27.1 R5.2 | v9.89,25.36 9.89,26.91 | 12.47,10.53 8.87,10.53 7.98,11.42 7.98,14.78 9.78,16.58 9.78,21.39 | 9.78,21.39 9.84,21.33 v9.84,21.23 | 9.78,21.39 9.76,21.41
N$19
  Bottom 0.2: 48.87,19.36 48.84,19.33 | U$12.5 49.38,18.85
  Bottom 0.3: 49.38,18.85 48.87,19.36 48.77,19.46 48.77,19.5 | 48.77,19.5 48.77,19.51 | 48.77,19.5 Q1.2
N$23
  Bottom 0.2: 39.07,23.37 39.42,23.02 38.84,23.72 39.09,23.47 39.1,23.27 R21.2 | U$15.8 40.46,26.53 40.48,26.51 40.48,25.83 40.04,25.39
  Bottom 0.25: 39.21,23.23 39.18,23.2 | R21.2 39.21,23.23 | 39.21,23.23 39.22,23.24
  Bottom 0.3: 39.22,23.24 39.22,24.79 39.22,25.1 39.51,25.39 40.04,25.39
N$25
  Bottom 0.2: R8.2 41.59,24.98 | U$15.7 40.96,26.39 40.97,26.38 40.97,25.61
  Bottom 0.3: 41.59,24.98 40.97,25.61
N$26
  Bottom 0.2: R11.1 88.56,24.1 88.64,24.18 88.5,24.18 86.62,26.05 86.62,28.48 86.75,28.61 86.66,28.7 Q10.3 | 83.65,39.76 83.52,39.63 | 83.65,39.76 U$4.1 | 83.67,39.78 83.65,39.76
  Bottom 0.3: Q10.3 86.66,30.14 87.97,31.46 87.97,37.36 85.55,39.78 83.67,39.78
N$27
  Bottom 0.2: 83.47,28.69 83.37,28.69 83.37,28.68 | R10.1 85.69,23.9 85.69,24.41 | 84.97,23.78 84.93,23.82 R10.1 | 85.35,24.54 85.24,24.43 R10.1
  Bottom 0.3: 83.37,28.69 Q12.3 | 83.73,28.42 84.12,28.03 84.12,25.77 85.35,24.54 | 83.73,28.42 83.47,28.69 | Q13.1 77.44,47.27 77.44,49.16 78,49.7 85.19,49.7 85.75,49.16 85.75,43.7 84.73,42.69 82.57,42.69 81.64,41.76 81.64,39.77 | 81.64,39.77 81.64,39.28 82.75,38.18 86.01,38.18 87.15,37.04 87.15,31.83 83.73,28.42 | 81.64,39.77 81.64,39.8
N$28
  Bottom 0.2: 44.39,23.53 44.34,23.48 | R8.1 44.39,23.53 | 44.39,23.53 44.89,24.03 | U$15.6 41.48,26.55 44.13,26.55 R14.2
  Bottom 0.25: R8.1 44.74,23.9 44.99,24.15
  Bottom 0.3: R14.2 44.99,24.15
N$29
  Bottom 0.2: IC2.7 92.22,10.48 92.25,10.46 92.32,10.53 | 90.46,28.63 R9.2 90.49,28.62 | 92.09,21.8 92.09,21.71 | 90.49,28.62 90.17,28.3 | 91.3,28.66 90.52,28.66 90.49,28.62
  Bottom 0.25: IC2.7 93.94,10.54 95.01,11.62 95.01,18.31 | 92.09,21.61 92.08,21.61 92.08,21.24
  Bottom 0.3: Q10.1 89.4,28.63 90.46,28.63 | 91.3,28.66 92.09,27.86 92.09,21.8 92.09,21.61 92.09,21.18 | 95.01,18.31 92.08,21.24
N$30  (via drill 0.6 pad 1.3, 0.6 pad 1.4)
  Top 0.2: v84.55,7.43 84.36,7.46 v79.62,22.23
  Bottom 0.2: 83.19,24.38 83.37,24.21 83.18,24.02 R7.2 82.69,23.91 81.77,23.91 80.09,22.23 v79.62,22.23 | 85.92,8.46 IC2.9 | 85.92,7.36 85.92,7.28 | 85.92,7.36 85.94,7.36 | v84.55,7.43 84.62,7.36 85.92,7.36
  Bottom 0.25: 85.92,7.36 85.92,8.46
  Bottom 0.3: Q12.1 83.19,25.97 83.19,24.38
N$32
  Bottom 0.2: U$20.7 53.86,26.11 | 56.24,25.55 56.27,25.58 | R24.2 56.24,25.55 | 56.24,25.55 56.05,25.36
  Bottom 0.25: 56.36,25.52 56.12,25.52 R24.2
  Bottom 0.3: 53.86,26.11 54.45,25.52 56.12,25.52
N$33
  Bottom 0.2: 58.88,28.22 58.95,28.28 58.87,28.36 R25.2 58.33,27.86 | U$20.6
  Bottom 0.25: U$20.6 55.45,27.53
  Bottom 0.3: 58.88,28.22 R24.1 | 58.33,27.86 55.77,27.86 55.45,27.53
N$34
  Bottom 0.2: R26.2 55.84,22.84 | U$20.8 53.36,27.55 53.37,27.55 53.37,25.3
  Bottom 0.3: 55.84,22.84 53.37,25.3
N$37
  Bottom 0.2: 77.22,29.03 77.32,28.93 Q14.3 77,28.89 | 73.59,28.08 73.78,28.08 R19.1 74.05,28.34 74.05,28.38 | 84.02,30.13 77.8,30.13 77,29.33 77,28.89 | 77,28.89 77,28.86 | 76.48,28.38 77,28.89
  Bottom 0.3: 74.05,28.38 76.48,28.38 | U$3.1 73.08,37.88 73.08,34.35 73.2,34.23 80.02,34.23 80.17,34.38 | 80.17,34.38 83.09,37.3 85.12,37.3 85.86,37.3 86.36,36.8 86.36,32.03 84.46,30.13 84.02,30.13 | 80.17,34.38 80.15,34.36
N$38
  Bottom 0.2: 67.46,28.34 67.39,28.41 67.33,28.34 R18.1 66.88,28.21 66.7,28.21 | 70.39,28.36 70.41,28.36 Q16.3
  Bottom 0.3: Q16.3 67.46,28.34 | Q17.1 59.92,42.88 59.92,34.88 60.65,34.15 61.46,34.15 61.46,34.14 61.7,33.91 67.77,33.91 70.42,36.55 72.19,36.55 72.47,36.28 72.47,34.06 72.95,33.58 81.82,33.58 82.59,34.36 82.59,35.78 83.42,36.61 85.16,36.61 85.55,36.22 85.55,32.35 84.03,30.83 71.75,30.83 70.39,29.48 70.39,28.36
N$39  (via drill 0.6 pad 1.3)
  Top 0.2: v76.64,21.16 76.64,15.53 v81.69,10.48
  Bottom 0.2: 76.47,24.16 76.49,24.16 R17.2 | v76.64,21.16 76.42,21.38 | 78.51,10.54 78.5,10.55 | IC6.7 78.51,10.54 | 78.51,10.54 78.57,10.48
  Bottom 0.25: 76.55,21.93 76.42,21.8 76.42,21.38
  Bottom 0.3: 76.55,21.93 R17.2 | 78.57,10.48 v81.69,10.48 | 76.47,24.16 77.92,25.61 Q14.1
N$40  (via drill 0.6 pad 1.3)
  Top 0.2: v71.42,20.93 71.42,9.3 v75.42,5.31
  Bottom 0.2: 71.42,26.13 Q16.1 | 70.84,23.03 70.85,23.03 R16.2 71.42,22.69 v71.42,20.93 | IC6.9 71.15,9.26 70.87,8.98
  Bottom 0.25: 71.42,22.69 71.42,26.13
  Bottom 0.3: 70.87,8.98 70.3,8.41 68.84,8.41 68.44,8.01 68.44,6.18 70.6,4.02 74.05,4.02 75.26,5.23 75.34,5.23 v75.42,5.31
N.C.  (via drill 0.6 pad 1.3)
  Top 0.3: v50.49,32.55 v55.32,32.55
  Bottom 0.2: U$15.4 40.99,30.58 40.99,31.48 | U$20.4 53.86,31.54 53.84,31.55 53.87,31.58 53.87,32.53 53.9,32.56 v55.32,32.56 | v55.32,32.56 55.44,32.56 | v55.32,32.55 v55.32,32.56 | v50.49,32.55
  Bottom 0.3: 40.99,31.48 41.52,32.01 43.14,32.01 43.27,31.88 43.45,31.88 43.57,31.76 45.49,31.76 47.2,33.45 48.87,33.45 49.77,32.55 v50.49,32.55
SCL
  Bottom 0.2: 54.55,17.33 54.55,17.29 U$12.13
  Bottom 0.25: 54.55,17.29 54.55,15.8
  Bottom 0.3: CON1.4 62.6,14.61 55.69,14.61 54.55,15.75 54.55,15.8
SDA
  Bottom 0.25: U$12.12 53.92,15.47
  Bottom 0.3: 53.92,15.47 55.42,13.98 60.49,13.98 63.39,11.08 66.14,11.08 67.2,12.13 CON1.2
VDD
  Bottom 0.2: 38.83,29.89 39.46,30.52 U$15.1 39.46,28.34 40.27,27.53 | U$20.1 52.34,31.51 52.32,31.53 51.88,31.09 | 51.88,31.09 51.87,31.08 51.87,30.64 | 53.47,29.03 53.56,29.12 | U$20.9 52.86,27.37 52.84,27.36 52.84,28.41 | 40.34,27.6 40.27,27.53 | 42.77,27.66 C7.1 | IC4.3 20.24,16.86 20.24,16.91 | 25.79,19.28 25.75,19.32 IC3.16 25.82,19.32 | 24.2,11.7 24.32,11.7 24.32,11.78 | 25.67,14.25 25.65,14.24 IC3.12 | 12.41,19.39 12.45,19.36 | 12.41,19.39 IC4.16 | 12.37,19.43 12.41,19.39 | 12.34,11.8 12.31,11.77 IC4.10 | 12.34,11.8 12.37,11.83 | IC4.10 12.32,11.83 12.5,11.65 | IC3.10 25.34,11.7 25.32,11.68 25.29,11.65 | 12.34,11.8 9.82,11.8 9.77,11.85 9.74,11.83 C6.1 9.74,11.73 9.67,11.65 | 85.28,13.07 85.3,13.05 | 85.28,13.07 IC2.12 84.97,13.07 84.97,13.08 | 85.22,13.13 85.28,13.07 | 71.45,14.32 71.47,14.3 | 71.45,14.32 IC6.13 | 70.09,14.48 69.97,14.48 69.97,14.5 | 70.09,14.48 71.3,14.48 71.45,14.32 | 86.95,10.54 87.02,10.54 | 71.42,10.53 71.37,10.58 | 71.42,10.53 IC6.10 71.87,10.53 | 71.42,10.53 71.44,10.5 | 23.62,11.78 23.57,11.78 | 23.62,11.78 23.82,11.78 23.82,11.79 | 23.62,11.88 23.62,11.78 | 27.34,11.68 27.32,11.68 27.2,11.68 27.29,11.68 | U$15.9 | C4.1 88.21,5.74 | U$20.9 | 68.52,15.15 CON1.1 | 70.09,14.5 70.09,14.48 | 50.67,17.28 U$12.7 | 39.97,26.71 39.97,26.58 U$15.9 | 12.22,15.6 IC4.13 | 10.07,15.58 10.09,15.6 | IC4.10 12.27,11.75 13.32,11.75 | 49.88,30.33 49.8,30.41 | R28.2 49.88,30.33 | 50.17,29.71 50.17,30.03 49.88,30.33 | 51.88,31.09 51.89,31.08 | U$20.9 52.87,24.99 | 78.83,15.62 78.84,15.63 | 78.83,15.62 IC6.3 | 78.82,15.6 78.83,15.62 | 87.12,17.23 87.12,17.05 | IC2.4 92.22,14.38 92.14,14.46 92.05,14.35 | 87.39,11.03 87.42,11 | 71.45,14.32 71.32,14.46
  Bottom 0.2: 87.12,16.61 87.17,16.61 | 57.42,19.41 57.37,19.36 57.67,19.36 57.41,19.1 C5.1 57.39,19.27 | U$12.16 | 47.42,16.45 U$12.2 | 47.67,16.21 47.76,16.21 47.76,16.15 | U$12.7 | U$12.7 50.67,17.83 50.67,18.01 | IC3.4 32.72,15.53 | 28.27,7.48 28.27,7.13 28.19,7.13 C2.1 28.11,7.33 28.12,7.33 | 54.12,21.91 54.22,21.81 54.21,21.8 54.12,21.89 | IC2.16 85.17,18.21 85.17,18.27 85.14,18.27 | 85.24,18.12 85.2,18.16 IC2.16 | IC2.16 85.05,18.16 85.05,18.15 84.69,18.51 | 25.82,19.32 25.83,19.33 | 25.8,19.3 25.82,19.32 | U$15.9 39.96,27.22 40.27,27.53
  Bottom 0.25: C7.1 40.34,27.6 | 43.92,28.8 42.77,27.66 | IC2.10 86.95,10.54 87.42,11 | 84.97,13.08 86.67,13.08 87.39,12.35 87.39,11.03 | C4.1 88.39,9.16 87.02,10.54 | U$12.16 56.52,18.21 57.41,19.1 | 68.52,15.15 69.17,14.5 | 57.07,16.08 56.52,16.63 U$12.16 | 50.67,16.53 U$12.7 | IC6.16 72.42,19.12 81.23,19.12 82.46,20.35 83.92,20.35 84.69,19.58 84.69,18.51 | 85.2,18.16 84.83,18.53 | 50.67,17.83 50.68,17.83 50.68,18.1 | 47.42,16.41 47.42,16.45
  Bottom 0.3: 38.83,29.89 R23.2 | 53.56,29.12 C1.1 | 52.84,28.41 53.47,29.03 51.87,30.64 | 24.32,11.7 IC3.10 | IC4.3 15.24,16.86 14.59,17.51 10.49,17.51 | 12.37,19.43 10.92,19.43 10.49,19.01 10.49,17.51 | 25.32,11.68 27.2,11.68 | IC6.3 80.33,15.62 82.14,13.8 | 82.14,13.8 82.82,13.13 85.22,13.13 | IC2.16 86.44,18.16 87.12,17.48 87.12,17.23 87.12,16.61 87.12,15.65 86.42,14.96 83.3,14.96 82.14,13.8 | C3.1 74.15,9.07 72.69,10.53 71.87,10.53 70.07,10.53 69.64,10.96 69.64,13.9 70.2,14.46 71.32,14.46 | 23.82,11.78 24.32,11.78 | 25.65,14.24 24.08,14.24 23.47,13.63 23.47,12.03 23.57,11.92 | 23.57,11.92 23.62,11.88 | 69.17,14.5 70.09,14.5 | 9.67,11.65 8.84,12.48 8.84,14.35 10.07,15.58 10.49,16 10.49,17.51 | 10.09,15.6 12.22,15.6 | 13.32,11.75 14,11.08 14,7.88 14.54,7.33 20.97,7.33 22.24,8.6 22.24,10.59 23.57,11.92 | 43.92,28.8 49.27,28.8 50.17,29.71 | R28.2 51.06,30.25 51.89,31.08 | IC6.13 74.33,14.34 75.59,15.6 78.82,15.6 | 92.05,14.35 89.82,14.35 89.22,14.96 88.82,14.96 87.17,16.61 | 68.52,15.15 67.85,15.15 66.39,16.61 61.24,16.61 60.72,16.08 57.07,16.08 | 47.42,16.45 47.67,16.21 | 47.76,16.21 50.34,16.21 50.67,16.53 | IC3.4 31.14,15.53 27.29,11.68 | 27.32,11.68 27.52,11.48 27.52,8.23 28.27,7.48 | 28.12,7.33 28.12,6.46 28.47,6.11 31.07,6.11 31.42,6.46 31.42,8.5 32.67,9.75 34.08,9.75 34.74,10.42 34.74,11.41 35.09,11.76 35.09,13.7 36.71,15.32 36.71,16.47 37.31,17.07 41.78,17.07 42.23,17.07 43.22,16.08 47.1,16.08 47.42,16.41 | 54.22,21.81 55.67,20.36 56.89,20.36 57.39,19.86 57.39,19.27 | 20.24,16.91 22.02,16.91 22.28,17.17 22.28,17.92 23.66,19.3 25.8,19.3 | 52.87,24.99 54.12,23.74 54.12,21.89
  Bottom 0.3: 54.12,21.91 52.8,21.91 52.15,21.25 52.15,20.33 52.62,19.86 52.62,18.93 52.1,18.41 50.99,18.41 50.68,18.1

## Text on the board
Bottom: Motor Controller | Rev 2 | studentrobotics.org